# Altium PCB PCB1.pcbdoc
Units mil, origin at the board's own origin, x right, y up, seen from the top; angles counter-clockwise.
Board outline 2705 x 3425 mil, 2 copper layers (Top Layer, Bottom Layer); 17 components, 34 nets, 146 pads, 3 vias.
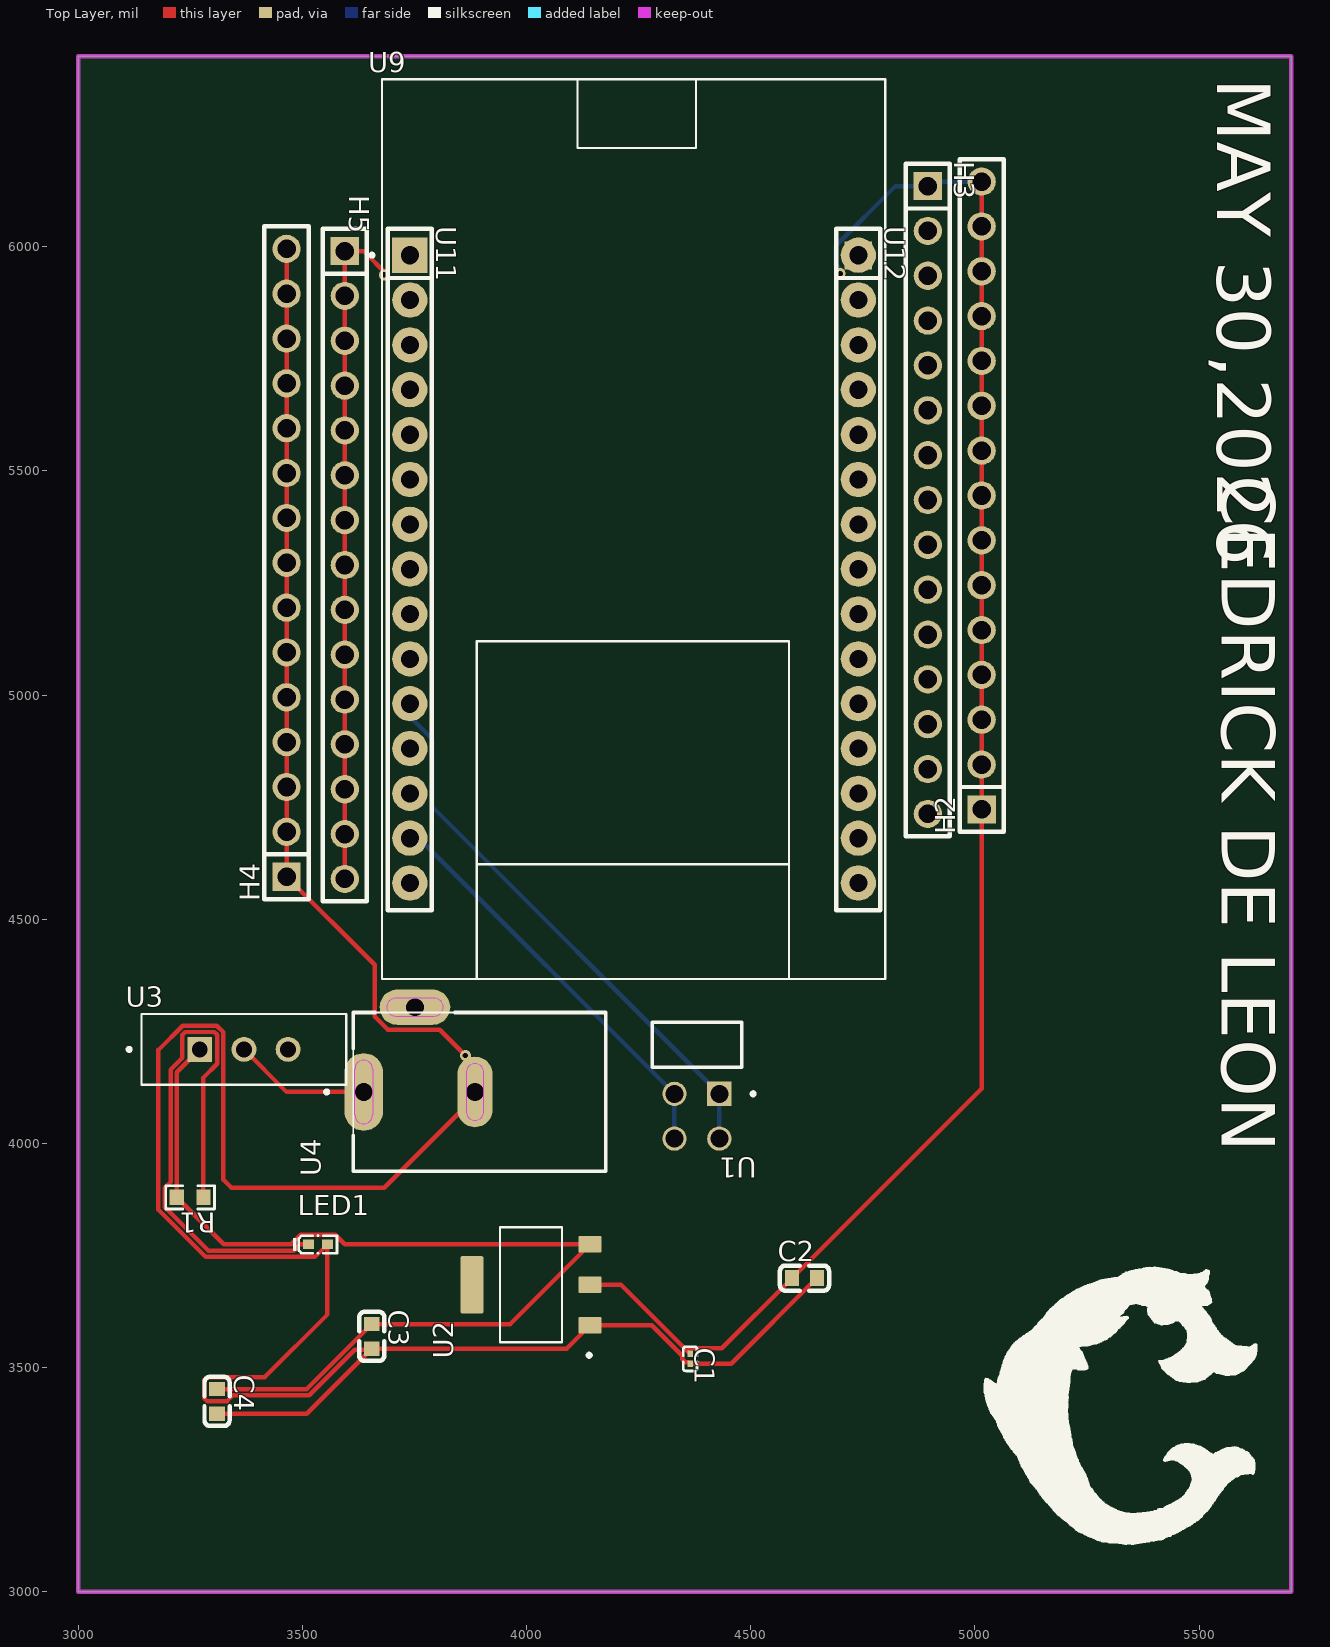
[diagram p0: Top Layer view]
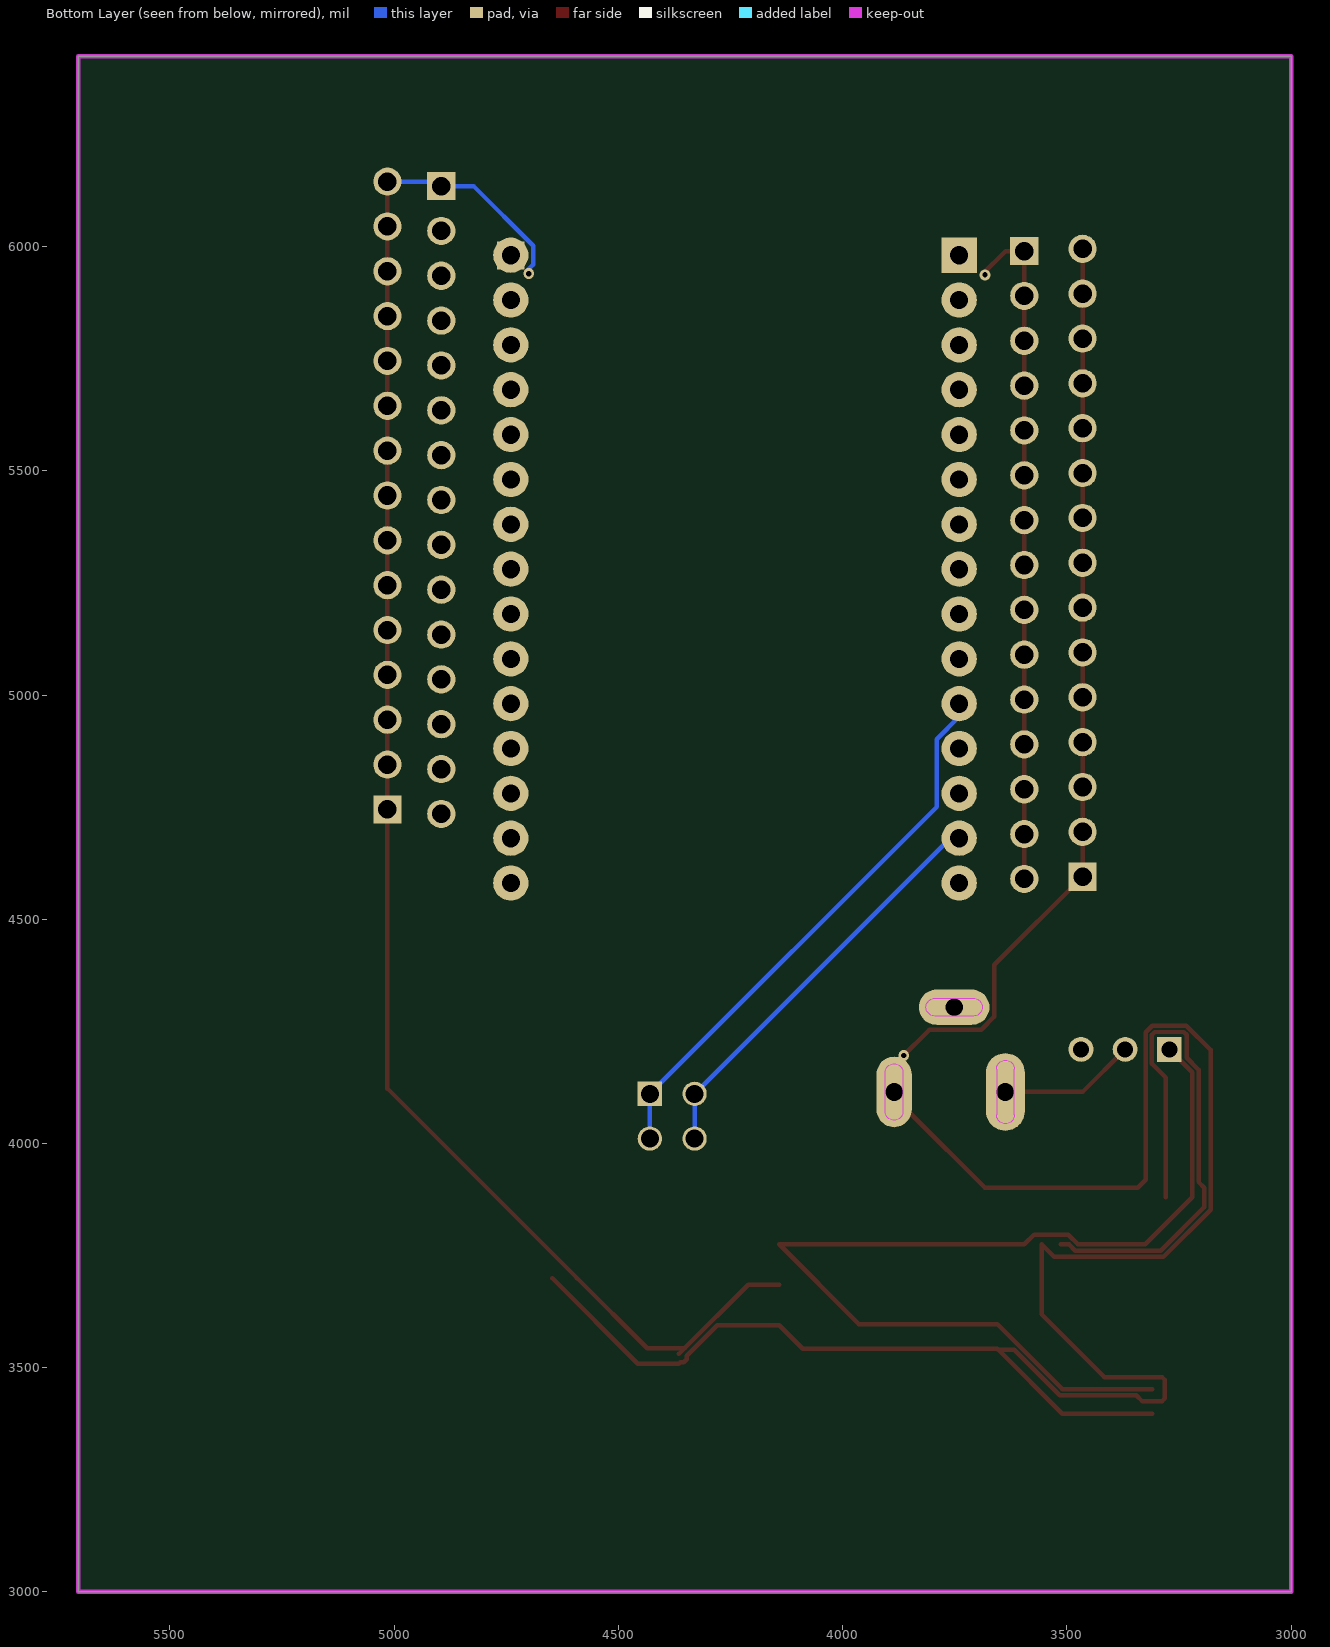
[diagram p1: Bottom Layer view, seen from below]

## Layer stack, top to bottom
Top Layer: signal copper (thickness not stored)
Dielectric: dielectric 12.6, FR-4, Dk 4.8
Bottom Layer: signal copper (thickness not stored)

## Board outline
3000,6425 5705,6425 5705,3000 3000,3000

## Design rules (kind name [scope] priority, off if disabled: settings)
BoardOutlineClearance copperThickness1oz [All] p0: genericclearance=10 ignorepadtopadclearanceinfootprint=FALSE except(0: Arc-SplitContinuation Track-SplitContinuation SMDPad-SplitContinuation THPad-SplitContinuation Via-SplitContinuation Fill-SplitContinuation Poly-SplitContinuation Region-SplitContinuation Text-SplitContinuation; 6: Track-CutoutEdge SMDPad-CutoutEdge THPad-CutoutEdge Via-CutoutEdge Region-CutoutEdge; 11.8: Track-OutlineEdge SMDPad-OutlineEdge THPad-OutlineEdge Via-OutlineEdge Fill-OutlineEdge Region-OutlineEdge Poly-OutlineEdge Text-OutlineEdge Fill-CutoutEdge)
BoardOutlineClearance copperThickness2oz [All] p0: genericclearance=10 ignorepadtopadclearanceinfootprint=FALSE except(0: Arc-SplitContinuation Track-SplitContinuation SMDPad-SplitContinuation THPad-SplitContinuation Via-SplitContinuation Fill-SplitContinuation Poly-SplitContinuation Region-SplitContinuation Text-SplitContinuation; 6: Track-CutoutEdge SMDPad-CutoutEdge THPad-CutoutEdge Via-CutoutEdge Region-CutoutEdge; 11.8: Track-OutlineEdge SMDPad-OutlineEdge THPad-OutlineEdge Via-OutlineEdge Fill-OutlineEdge Region-OutlineEdge Poly-OutlineEdge Text-OutlineEdge Fill-CutoutEdge)
Clearance copperThickness1oz [(InNet('GND') OR InNet('+5V') OR InNet('VCC') OR InNet('+3V3') OR InNet('D15') OR InNet('D2') OR InNet('D4') OR InNet('RX2') OR InNet('TX2') OR InNet('D5') OR InNet('D18') OR InNet('D19') OR InNet('D21') OR InNet('D22') OR InNet('D23') OR InNet('$1N506') OR InNet('$1N938') OR InNet('EN') OR InNet('VP') OR InNet('VN') OR InNet('3V3') OR InNet('RX0') OR InNet('TX0') OR InNet('VIN') OR InNet('D13') OR InNet('D12') OR InNet('D14') OR InNet('D27') OR InNet('D26') OR InNet('D25') OR InNet('D33') OR InNet('D32') OR InNet('D35') OR InNet('D34'))] p1: gap=7 ignorepadtopadclearanceinfootprint=FALSE except(4: Track-Track; 6: Track-SMDPad SMDPad-SMDPad Track-THPad SMDPad-THPad THPad-THPad Track-Via SMDPad-Via THPad-Via Via-Via SMDPad-Fill THPad-Fill Via-Fill Fill-Fill Track-Region SMDPad-Region THPad-Region Via-Region Region-Region Track-Poly SMDPad-Poly THPad-Poly Via-Poly Fill-Poly Region-Poly Poly-Poly Track-Text SMDPad-Text THPad-Text Via-Text Fill-Text Region-Text Poly-Text Text-Text; 6.9: Track-Hole SMDPad-Hole THPad-Hole Via-Hole Fill-Hole Region-Hole Poly-Hole Text-Hole Sheet-Hole; 11.8: Track-Fill Fill-Region Track-Sheet SMDPad-Sheet THPad-Sheet Via-Sheet Fill-Sheet Region-Sheet Poly-Sheet Text-Sheet)
Clearance copperThickness2oz [All] p1: gap=7 ignorepadtopadclearanceinfootprint=FALSE except(6: Track-SMDPad SMDPad-SMDPad Track-THPad SMDPad-THPad THPad-THPad Track-Via SMDPad-Via THPad-Via Via-Via SMDPad-Fill THPad-Fill Via-Fill Fill-Fill Track-Region SMDPad-Region THPad-Region Via-Region Region-Region Track-Poly SMDPad-Poly THPad-Poly Via-Poly Fill-Poly Region-Poly Poly-Poly Track-Text SMDPad-Text THPad-Text Via-Text Fill-Text Region-Text Poly-Text Text-Text; 6.9: Track-Hole SMDPad-Hole THPad-Hole Via-Hole Fill-Hole Region-Hole Poly-Hole Text-Hole Sheet-Hole; 8: Track-Track; 11.8: Track-Fill Fill-Region Track-Sheet SMDPad-Sheet THPad-Sheet Via-Sheet Fill-Sheet Region-Sheet Poly-Sheet Text-Sheet)
DiffPairsRouting differentialPair [All] p1: maxuncoupledlength=10 minlimit=6 maxlimit=6 mostfreqgap=6 toplayer_minwidth=5 toplayer_prefwidth=10 toplayer_maxwidth=100 bottomlayer_minwidth=5 bottomlayer_prefwidth=10 bottomlayer_maxwidth=100
PasteMaskExpansion pasteMaskExpansion [All] p1: expansion=0
PlaneConnect innerPlane [All] p1: planeconnectstyle=Relief reliefexpansion=20 reliefentries=4 reliefconductorwidth=10 reliefairgap=10
PolygonConnect copperRegion [All] p1: connectstyle=Relief reliefentries=4 reliefconductorwidth=10 polygonreliefangle="90 Angle" airgapwidth=10
RoutingVias viaSize [All] p1: viastyle="Through Hole" holewidth=12.0078 minholewidth=11.811 maxholewidth=248.0314 width=24.0158 minwidth=19.685 maxwidth=393.7008
SolderMaskExpansion solderMaskExpansion [All] p1: useseparateexpansions=TRUE expansion=2 expansionbottom=2
Width copperThickness1oz [All] p1: maxlimit=100 minlimit=5 preferedwidth=10
Width copperThickness2oz [All] p1: maxlimit=100 minlimit=8 preferedwidth=10

## Components (designator, comment, footprint, x,y, rotation, side; value= is the part's Value field where it differs from the comment)
C1 "CAP_0201" C0201 4365,3520 r270 top
C2 "CAP_0603" C0603 4620,3700 r0 top
C3 "CAP_0603" C0603 3655,3570 r270 top
C4 "CAP_0603" C0603 3310,3425 r270 top
H2 "2011-1X15G00SB" HDR-TH_15P-P2.54-V-M 5015,5445 r90 top
H3 "2011-1X15G00SB" HDR-TH_15P-P2.54-V-M 4895,5435 r270 top
H4 "2011-1X15G00SB" HDR-TH_15P-P2.54-V-M 3465,5295 r90 top
H5 "2011-1X15G00SB" HDR-TH_15P-P2.54-V-M 3595,5290 r270 top
LED1 "LED_0402-R" LED0402-RD_YELLOW 3535,3775 r0 top
R1 "Res_0603" R0603 3250,3880 r180 top
U1 "MTSW-102-10-L-D-472-RA" SAMTEC_MTSW-102-10-L-D-472-RA 4380,4220 r180 top
U2 "AMS1117-5.0" SOT229P700X180-4N 4010,3685 r90 top
U3 "MINI-SPDT-SW" SW_MINI-SPDT-SW 3370,4210 r0 top
U4 "DCJ200-10-A-XX-K_REVA" GCT_DCJ200-10-A-XX-K_REVA 3895,4115 r90 top
U9 "ESP32-DEVKIT-V1" MODULE_ESP32_DEVKIT_V1 4240,5370 r0 top
U11 "HX PM2.54-1x15P ZC" HDR-TH_15P-P2.54-V-F-1 3740,5280 r270 top
U12 "HX PM2.54-1x15P ZC" HDR-TH_15P-P2.54-V-F-1 4740,5280 r270 top

## Footprints (in the part's own frame and the unit in brackets; to place one, negate y for a bottom-side part, rotate by r counter-clockwise, add the part's x,y. Pads: shape width x height; smd on the part's side, far side on the other; paste and mask are expansions set on the pad)
C0201 [mil]
  rect 14.51x12.76 smd: 1(-10.8,0) 2(10.8,0)
  silkscreen extent -27,-15 27,15
C0603 [mm]
  rect 0.8x0.9 smd: 1(-0.7,0) 2(0.7,0)
  silkscreen extent -1.39,-0.71 1.39,0.71
GCT_DCJ200-10-A-XX-K_REVA [mm]
  oval 4.4x2.2 hole 1: 1(0,6.55)
  oval 4x2 hole 1: 2(0,0.25)
  oval 2x4 hole 1: 3(4.8,3.65)
  Board Outline Layer lines w0.003: -1.3,7.05 ccw(c-1.3,6.55) -1.8,6.55 ; -1.3,7.05 ccw(c-1.3,6.55) -1.8,6.55 ; -1.3,7.05 1.3,7.05 ; -1.3,7.05 1.3,7.05 ; 1.3,7.05 cw(c1.3,6.55) 1.8,6.55 ; 1.3,7.05 cw(c1.3,6.55) 1.8,6.55 ; -1.8,6.55 ccw(c-1.3,6.55) -1.3,6.05 ; -1.8,6.55 ccw(c-1.3,6.55) -1.3,6.05 ; 1.8,6.55 cw(c1.3,6.55) 1.3,6.05 ; 1.8,6.55 cw(c1.3,6.55) 1.3,6.05 ; -1.3,6.05 1.3,6.05 ; -1.3,6.05 1.3,6.05 ; 4.8,5.25 cw(c4.8,4.75) 5.3,4.75 ; 4.8,5.25 cw(c4.8,4.75) 5.3,4.75 ; 4.8,5.25 ccw(c4.8,4.75) 4.3,4.75 ; 4.8,5.25 ccw(c4.8,4.75) 4.3,4.75 ; 4.3,4.75 4.3,2.55 ; 4.3,4.75 4.3,2.55 ; 5.3,4.75 5.3,2.55 ; 5.3,4.75 5.3,2.55 ; 4.3,2.55 ccw(c4.8,2.55) 4.8,2.05 ; 4.3,2.55 ccw(c4.8,2.55) 4.8,2.05 ; 5.3,2.55 cw(c4.8,2.55) 4.8,2.05 ; 5.3,2.55 cw(c4.8,2.55) 4.8,2.05 ; -1.1,0.75 ccw(c-1.1,0.25) -1.6,0.25 ; -1.1,0.75 ccw(c-1.1,0.25) -1.6,0.25 ; -1.1,0.75 1.1,0.75 ; -1.1,0.75 1.1,0.75 ; 1.1,0.75 cw(c1.1,0.25) 1.6,0.25 ; 1.1,0.75 cw(c1.1,0.25) 1.6,0.25 ; -1.6,0.25 ccw(c-1.1,0.25) -1.1,-0.25 ; -1.6,0.25 ccw(c-1.1,0.25) -1.1,-0.25 ; 1.6,0.25 cw(c1.1,0.25) 1.1,-0.25 ; 1.6,0.25 cw(c1.1,0.25) 1.1,-0.25 ; -1.1,-0.25 1.1,-0.25 ; -1.1,-0.25 1.1,-0.25
  silkscreen extent -4.5,-7.15 4.5,8.75
HDR-TH_15P-P2.54-V-F-1 [mm]
  rect 1.6x1.575 hole 1: 1(-17.78,0)
  round 1.6 hole 1: 2(-15.24,0) 3(-12.7,0) 4(-10.16,0) 5(-7.62,0) 6(-5.08,0) 7(-2.54,0) 8(0,0) 9(2.54,0) 10(5.08,0) 11(7.62,0) 12(10.16,0) 13(12.7,0) 14(15.24,0) 15(17.78,0)
  silkscreen extent -19.3,-1.25 19.3,1.25
HDR-TH_15P-P2.54-V-M [mm]
  rect 1.6x1.6 hole 1.05: 1(-17.78,0)
  round 1.6 hole 1.05: 2(-15.24,0) 3(-12.7,0) 4(-10.16,0) 5(-7.62,0) 6(-5.08,0) 7(-2.54,0) 8(0,0) 9(2.54,0) 10(5.08,0) 11(7.62,0) 12(10.16,0) 13(12.7,0) 14(15.24,0) 15(17.78,0)
  silkscreen extent -19.05,-1.25 19.05,1.25
LED0402-RD_YELLOW [mm]
  rect 0.636x0.54 smd: 1(-0.538,0) 2(0.538,0)
  silkscreen extent -1.39,-0.54 1.09,0.54
MODULE_ESP32_DEVKIT_V1 [mm]
  rect 2x2 hole 1.02: 1(-12.7,15.515)
  round 2 hole 1.02: 2(-12.7,12.975) 3(-12.7,10.435) 4(-12.7,7.895) 5(-12.7,5.355) 6(-12.7,2.815) 7(-12.7,0.275) 8(-12.7,-2.265) 9(-12.7,-4.805) 10(-12.7,-7.345) 11(-12.7,-9.885) 12(-12.7,-12.425) 13(-12.7,-14.965) 14(-12.7,-17.505) 15(-12.7,-20.045) 16(12.7,-20.045) 17(12.7,-17.505) 18(12.7,-14.965) 19(12.7,-12.425) 20(12.7,-9.885) 21(12.7,-7.345) 22(12.7,-4.805) 23(12.7,-2.265) 24(12.7,0.275) 25(12.7,2.815) 26(12.7,5.355) 27(12.7,7.895) 28(12.7,10.435) 29(12.7,12.975) 30(12.7,15.515)
  silkscreen extent -14.95,-25.48 14.23,25.48
R0603 [mil]
  rect 31.75x34.02 smd: 1(-29.66,0) 2(29.66,0)
  silkscreen extent -55,-26 55,26
SAMTEC_MTSW-102-10-L-D-472-RA [mm]
  rect 1.37x1.37 hole 1.02: 01(-1.27,2.77)
  round 1.37 hole 1.02: 02(-1.27,5.31) 03(1.27,2.77) 04(1.27,5.31)
  silkscreen extent -3.29,-1.27 2.54,2.87
SOT229P700X180-4N [mm]
  rrect15% 0.93x1.31 smd: 1(-2.29,-3.345) 2(0,-3.345) 3(2.29,-3.345)
  rrect15% 3.24x1.31 smd: 4(0,3.345)
  silkscreen extent -4.09,-3.4 3.25,1.75
SW_MINI-SPDT-SW [mm]
  rect 1.408x1.408 hole 0.9: 1(-2.5,0)
  round 1.408 hole 0.9: 2(0,0) 3(2.5,0)
  silkscreen extent -6.6,-2 5.8,2

## Via types
v1: diameter 24.02, hole 12.01, Top Layer to Bottom Layer, 3 vias

## Nets (pads, with @x,y where several pads share a name; then routed paths per layer and width w, separated by ;. In a path a pad name is that pad's centre, name@x,y a point inside that pad or via, vN(x,y) a via of type N, cw(c..) or ccw(c..) an arc to the next point about the centre after c; other vN are vias at no path point)
3V3: U9.1
$1N506: LED1.1 R1.1 | length 1224.2
  Top Layer w10: R1.1 3279.66,4147.12 3310.28,4177.73 3310.28,4242.27 3303.84,4248.7 3239.31,4248.7 3232.87,4242.27 3232.87,4191.12 3206.32,4164.57 3206.32,3914.4 3193.48,3901.56 3193.48,3858.44 3290.78,3761.14 3481.08,3761.14 3494.94,3775 LED1.1
$1N938: U3.2 U4.1 | length 270
  Top Layer w10: U3.2 3465,4115 U4.1@3600.63,4115
+3V3: H5.1 H5.2 H5.3 H5.4 H5.5 H5.6 H5.7 H5.8 H5.9 H5.10 H5.11 H5.12 H5.13 H5.14 H5.15 U11.1 | length 1516.6
  Top Layer w10: H5.15 H5.14 H5.13 H5.12 H5.11 H5.10 H5.9 H5.8 H5.7 H5.6 H5.5 H5.4 H5.3 H5.2 H5.1 3636.55,5990 v1@3689.65,5936.91
  other v1: 3682.64,5936.91
+5V: C1.1 C2.1 H2.1 H2.2 H2.3 H2.4 H2.5 H2.6 H2.7 H2.8 H2.9 H2.10 H2.11 H2.12 H2.13 H2.14 H2.15 H3.1 U2.2 U12.1 | length 3660
  Top Layer w10: U2.2 4210.8,3685 4352.45,3543.35 ; C1.1 4352.45,3543.35 ; H2.15 H2.14 H2.13 H2.12 H2.11 H2.10 H2.9 H2.8 H2.7 H2.6 H2.5 H2.4 H2.3 H2.2 H2.1 5015,4122.56 C2.1 4435.79,3543.35 4352.45,3543.35
  Bottom Layer w10: v1@4704.81,5944.81 4689.65,5959.97 4689.65,6001.68 4822.96,6135 H3.1 4905,6145 H2.15
  other v1: 4699.85,5939.85
D2: U9.4 U11.4
D4: U9.5 U11.5
D5: U9.8 U11.8
D12: U9.27 U12.4
D13: U9.28 U12.3
D14: U9.26 U12.5
D15: U9.3 U11.3
D18: U9.9 U11.9
D19: U9.10 U11.10
D21: U1.01 U1.02 U9.11 U11.11 | length 1254.9
  Bottom Layer w10: U11.11 3740,4952.04 3790.35,4901.68 3790.35,4750.59 U1.01 U1.02
D22: U1.03 U1.04 U9.14 U11.14 | length 926.1
  Bottom Layer w10: U9.14 3760.12,4680.83 U1.03 U1.04
D23: U9.15 U11.15
D25: U9.23 U12.8
D26: U9.24 U12.7
D27: U9.25 U12.6
D32: U9.21 U12.10
D33: U9.22 U12.9
D34: U9.19 U12.12
D35: U9.20 U12.11
EN: U9.16 U12.15
GND: C1.2 C2.2 C3.2 C4.2 H3.2 H3.3 H3.4 H3.5 H3.6 H3.7 H3.8 H3.9 H3.10 H3.11 H3.12 H3.13 H3.14 H3.15 H4.1 H4.2 H4.3 H4.4 H4.5 H4.6 H4.7 H4.8 H4.9 H4.10 H4.11 H4.12 H4.13 H4.14 H4.15 LED1.2 U2.1 U4.2 U11.2 U12.2 | length 6425.3
  Top Layer w10: C4.2 3510,3397.44 C3.2@3652.56,3540 ; H4.15 H4.14 H4.13 H4.12 H4.11 H4.10 H4.9 H4.8 H4.7 H4.6 H4.5 H4.4 H4.3 H4.2 H4.1 3661.57,4398.43 3661.57,4283.12 3691.07,4253.62 3806.38,4253.62 v1@3868.98,4191.02 ; U4.2@3848.88,4067.69 3682.75,3901.56 3342.06,3901.56 3324.29,3919.33 3324.29,4248.07 3309.65,4262.72 3233.5,4262.72 3179.46,4208.68 3179.46,3852.64 3284.98,3747.13 3528.32,3747.13 LED1.2 3556.19,3618.81 3416.67,3479.29 3287.73,3479.29 3281.3,3472.86 3281.3,3432.26 3287.73,3425.83 3332.27,3425.83 3344.98,3438.54 3515.81,3438.54 3617.26,3540 C3.2@3652.56,3540 ; U4.2@3882.28,4117.87 U4.2 ; C2.2 4456.76,3509.2 C1.2 4361.64,3512.56 4354.07,3512.56 4347.64,3519 4347.64,3526.56 4279.36,3594.84 U2.1 4089.29,3542.44 C3.2 C3.2@3652.56,3540
  other v1: 3863.8,4196.2
RX0: U9.12 U11.12
RX2: U9.6 U11.6
TX0: U9.13 U11.13
TX2: U9.7 U11.7
VCC: C3.1 C4.1 R1.2 U2.3 U3.1 | length 2299.1
  Top Layer w10: U3.1 3220.34,4158.77 R1.2 3325.18,3775.16 3475.27,3775.16 3496.73,3796.61 3573.27,3796.61 3594.73,3775.16 U2.3 3964.1,3597.56 C3.1 3510,3452.56 C4.1
VIN: U9.30
VN: U9.18 U12.13
VP: U9.17 U12.14
pads on no net: U2.4 U3.3 U4.3 U9.2 U9.29

## Keep-outs
Board Outline Layer:
  the board outline again, w10

## Silkscreen, mask and mechanical layers (free items; w line width, h text height)
Top Silkscreen Layer:
  drawing of 12 lines, arcs and shapes, not listed
  text "MAY 30,2026" at 5540,6375 h120 r270
  text "CEDRICK DE LEON" at 5550,5490 h120 r270